# EAGLE board smd_11 (EAGLE 9.3.0)
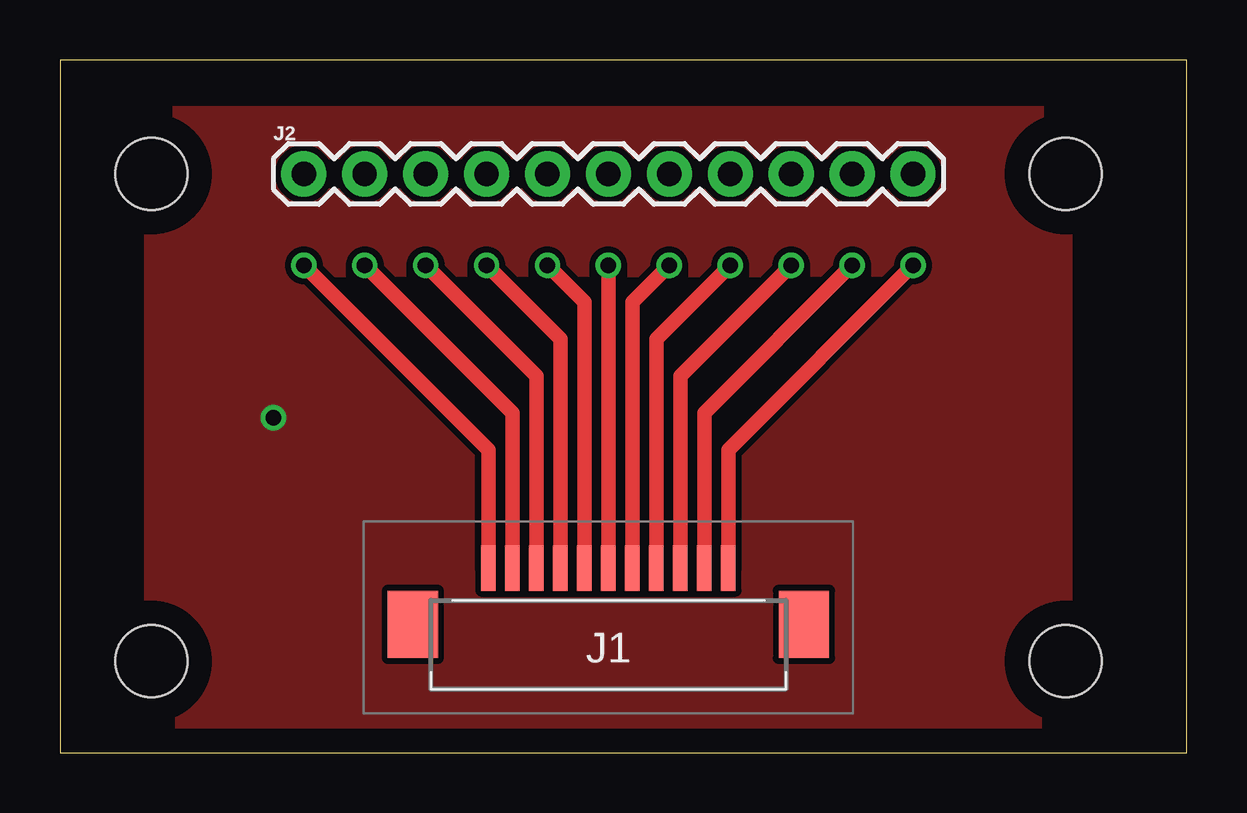
[diagram p0: board, top side]
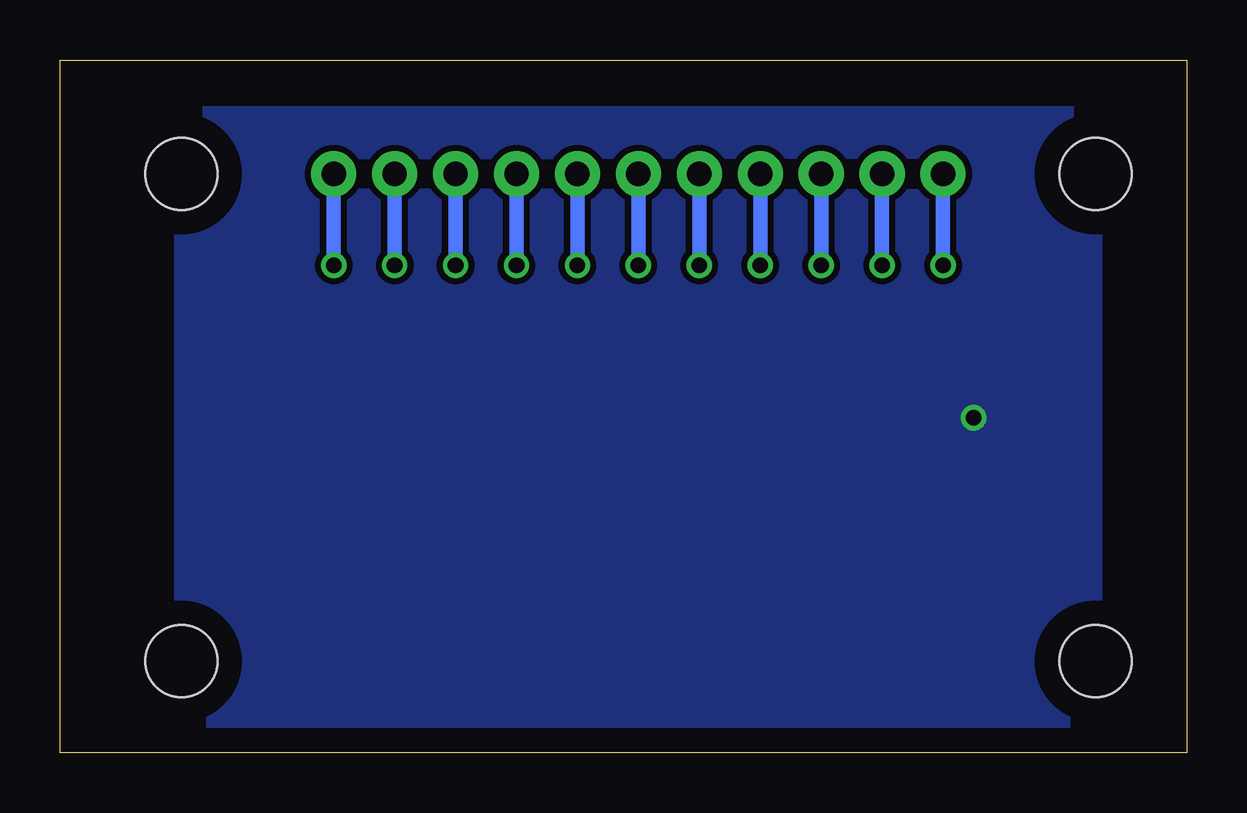
[diagram p1: board, bottom side, seen from below]

Size 46.97 x 28.88 mm. Coordinates in mm from the lower left corner, seen from the top.
Outline: 0,0 46.97,0 46.97,28.88 0,28.88 0,0
Copper layers (1*16): Top 0.035mm / dielectric 1.5mm / Bottom 0.035mm
Design rules "default": minimum track width 6mil, minimum drill 0.35mm, track to track 6mil, track to pad 6mil, pad to pad 6mil, via to via 6mil, smd to smd 6mil, copper to edge 40mil, drill to drill 6mil, minimum pad ring 10mil, minimum via ring 8mil, stop-mask expansion 4mil, vias tented up to drill 0mil, thermal gap 10mil
Net classes: 0 default: clearance 0.254 mm
Holes 3 mm at 3.81,3.81 3.81,24.13 41.91,24.13 41.91,3.81

## Footprints (pad centres in the part's own frame; a part is rotated, then mirrored left to right if it is on the bottom)
527931170 = smd 0.6 x 1.9: 1 -5,1.35; 2 -4,1.35; 3 -3,1.35; 4 -2,1.35; 5 -1,1.35; 6 0,1.35; 7 1,1.35; 8 2,1.35; 9 3,1.35; 10 4,1.35; 11 5,1.35 | smd 2.1 x 2.8: MP1 -8.15,-1; MP2 8.15,-1
1X11 = drill 1.016 pad 1.88: 1 0,0; 2 2.54,0; 3 5.08,0; 4 7.62,0; 5 10.16,0; 6 12.7,0; 7 15.24,0; 8 17.78,0; 9 20.32,0; 10 22.86,0; 11 25.4,0

## Placement (x,y rotation side)
J1  52793-1170  [527931170]  22.86,6.35 0 top
J2  [1X11]  10.16,24.13 0 top

## Library data of the parts
J1 = 52793-1170; DESCRIPTION: FFC & FPC Connectors 1.0 FFC Non ZIFHsgAs sySMT 11CktEmbsTpPkg; HEIGHT: 3.4mm; MANUFACTURER_NAME: Molex; MANUFACTURER_PART_NUMBER: 52793-1170; MOUSER_PART_NUMBER: 538-52793-1170; MOUSER_PRICE-STOCK: https://www.mouser.com/Search/Refine.aspx?Keyword=538-52793-1170
J2 = SparkFun-Connectors

## Nets
N$1: J1.1 J2.1
N$2: J1.2 J2.2
N$3: J1.3 J2.3
N$4: J1.4 J2.4
N$5: J1.5 J2.5
N$6: J1.6 J2.6
N$7: J1.7 J2.7
N$8: J1.8 J2.8
N$9: J1.9 J2.9
N$10: J1.10 J2.10
N$11: J1.11 J2.11

## Tracks (layer width: path | path; a pad name or v marks a point on that pad's centre or on a via)
GND  (via drill 0.65)
  other vias: 8.89,13.97
  pour Bottom: 3.81,26.67 41.91,26.67 41.91,1.27 3.81,1.27
  pour Top: 3.81,26.67 3.81,1.27 41.91,1.27 41.91,26.67
N$1  (via drill 0.65)
  Top 0.61: J1.1 17.86,12.62 v10.16,20.32
  Bottom 0.61: v10.16,20.32 J2.1
N$2  (via drill 0.65)
  Top 0.61: J1.2 18.86,14.16 v12.7,20.32
  Bottom 0.61: v12.7,20.32 J2.2
N$3  (via drill 0.65)
  Top 0.61: J1.3 19.86,15.7 v15.24,20.32
  Bottom 0.61: v15.24,20.32 J2.3
N$4  (via drill 0.65)
  Top 0.61: J1.4 20.86,17.24 v17.78,20.32
  Bottom 0.61: v17.78,20.32 J2.4
N$5  (via drill 0.65)
  Top 0.61: J1.5 21.86,18.78 v20.32,20.32
  Bottom 0.61: v20.32,20.32 J2.5
N$6  (via drill 0.65)
  Top 0.61: J1.6 v22.86,20.32
  Bottom 0.61: v22.86,20.32 J2.6
N$7  (via drill 0.65)
  Top 0.61: J1.7 23.86,18.78 v25.4,20.32
  Bottom 0.61: v25.4,20.32 J2.7
N$8  (via drill 0.65)
  Top 0.61: J1.8 24.86,17.24 v27.94,20.32
  Bottom 0.61: v27.94,20.32 J2.8
N$9  (via drill 0.65)
  Top 0.61: J1.9 25.86,15.7 v30.48,20.32
  Bottom 0.61: v30.48,20.32 J2.9
N$10  (via drill 0.65)
  Top 0.61: J1.10 26.86,14.16 v33.02,20.32
  Bottom 0.61: v33.02,20.32 J2.10
N$11  (via drill 0.65)
  Top 0.61: J1.11 27.86,12.62 v35.56,20.32
  Bottom 0.61: v35.56,20.32 J2.11